# Altium PCB PCB2.PcbDoc
Units mm, origin at the board's own origin, x right, y up, seen from the top; angles counter-clockwise.
Board outline 50 x 30 mm, 2 copper layers (Top Layer, Bottom Layer); 23 components, 21 nets, 102 pads, 22 vias.
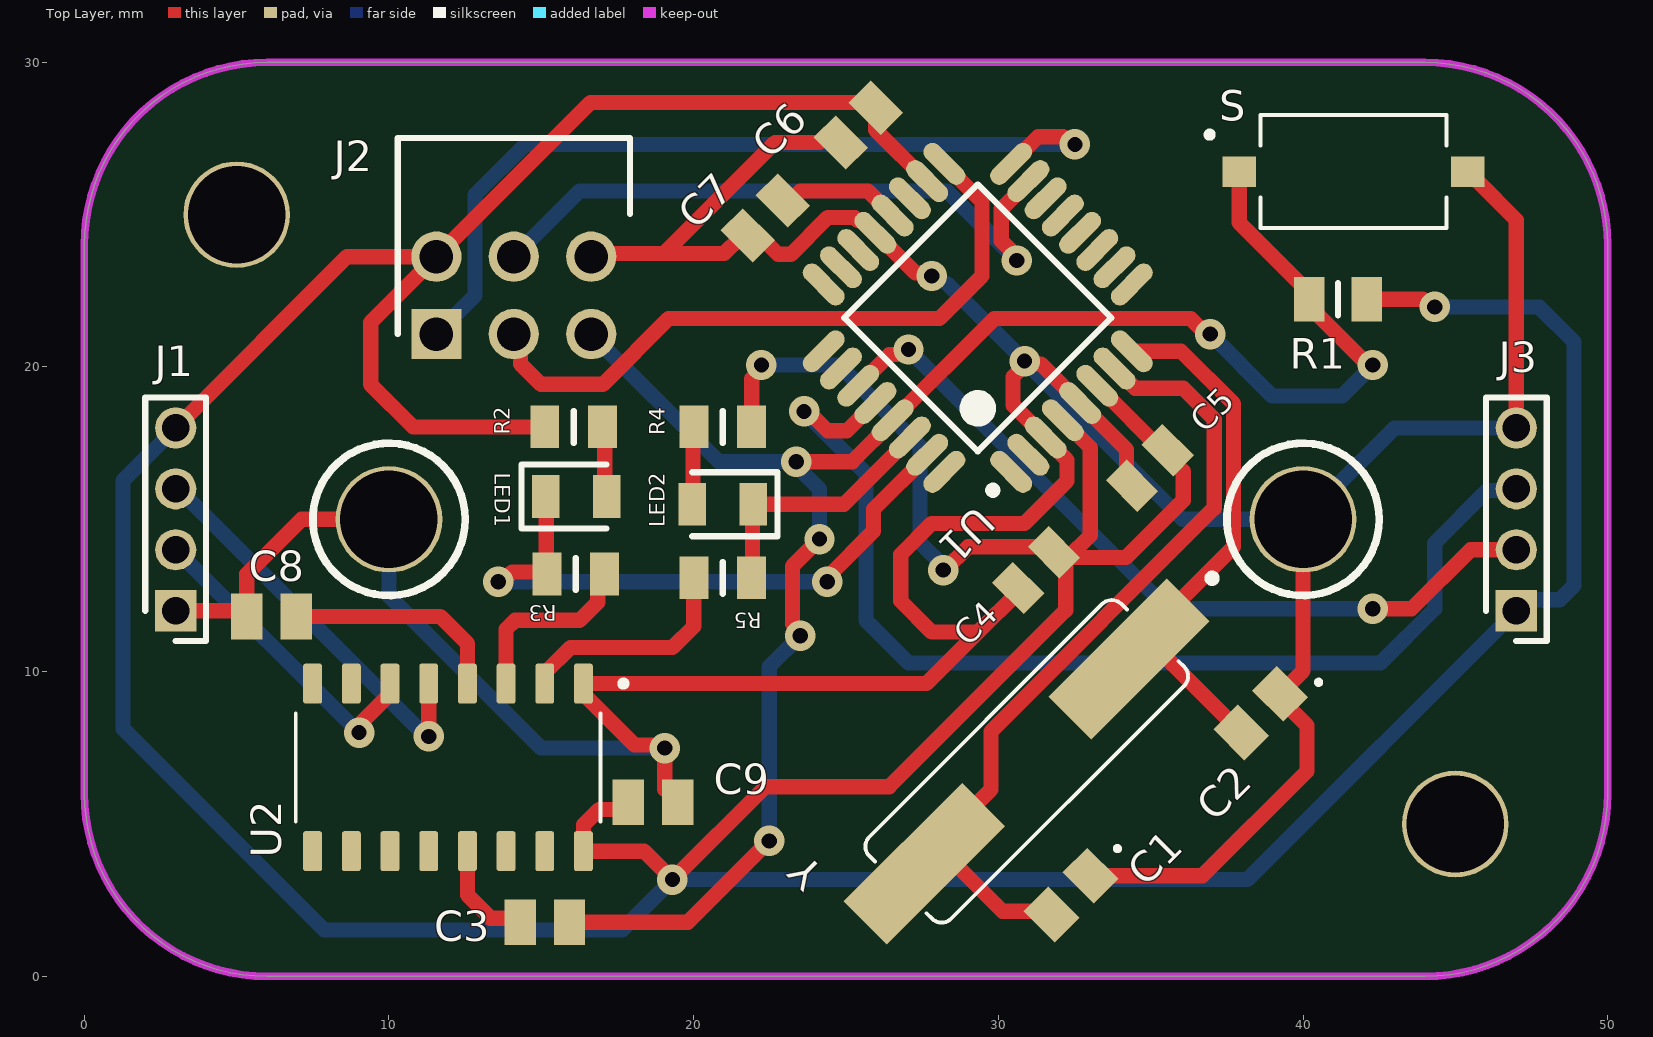
[diagram p0: Top Layer view]
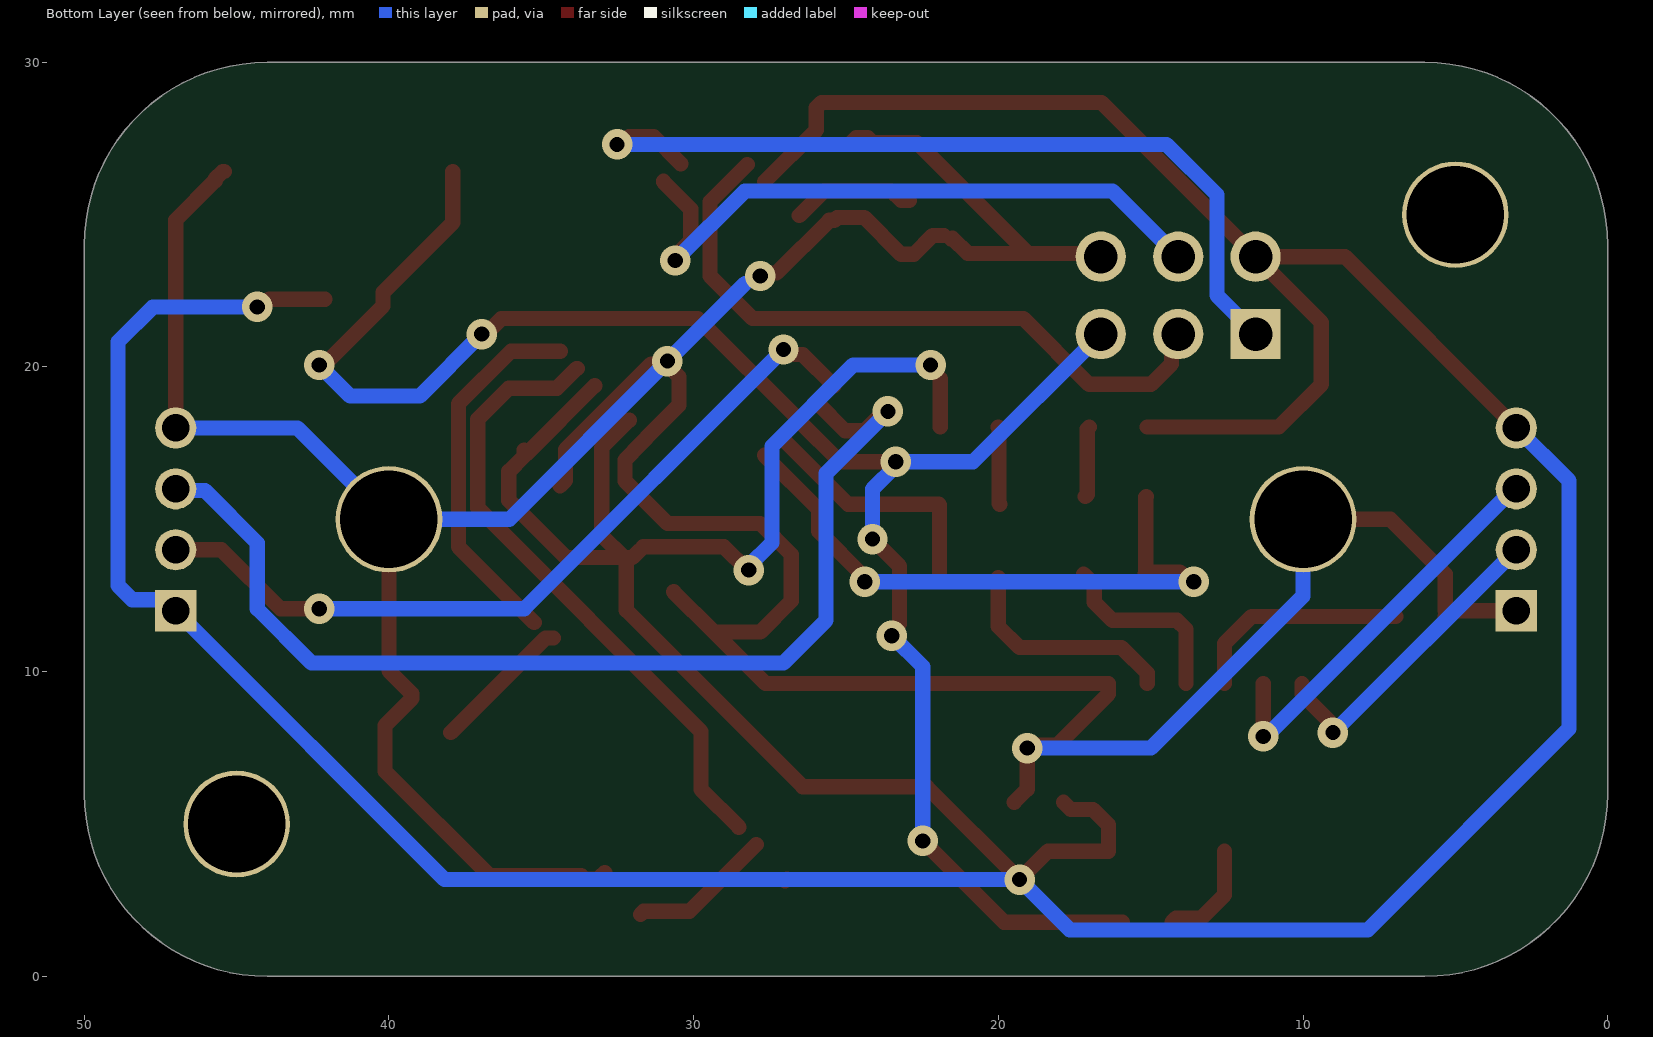
[diagram p1: Bottom Layer view, seen from below]
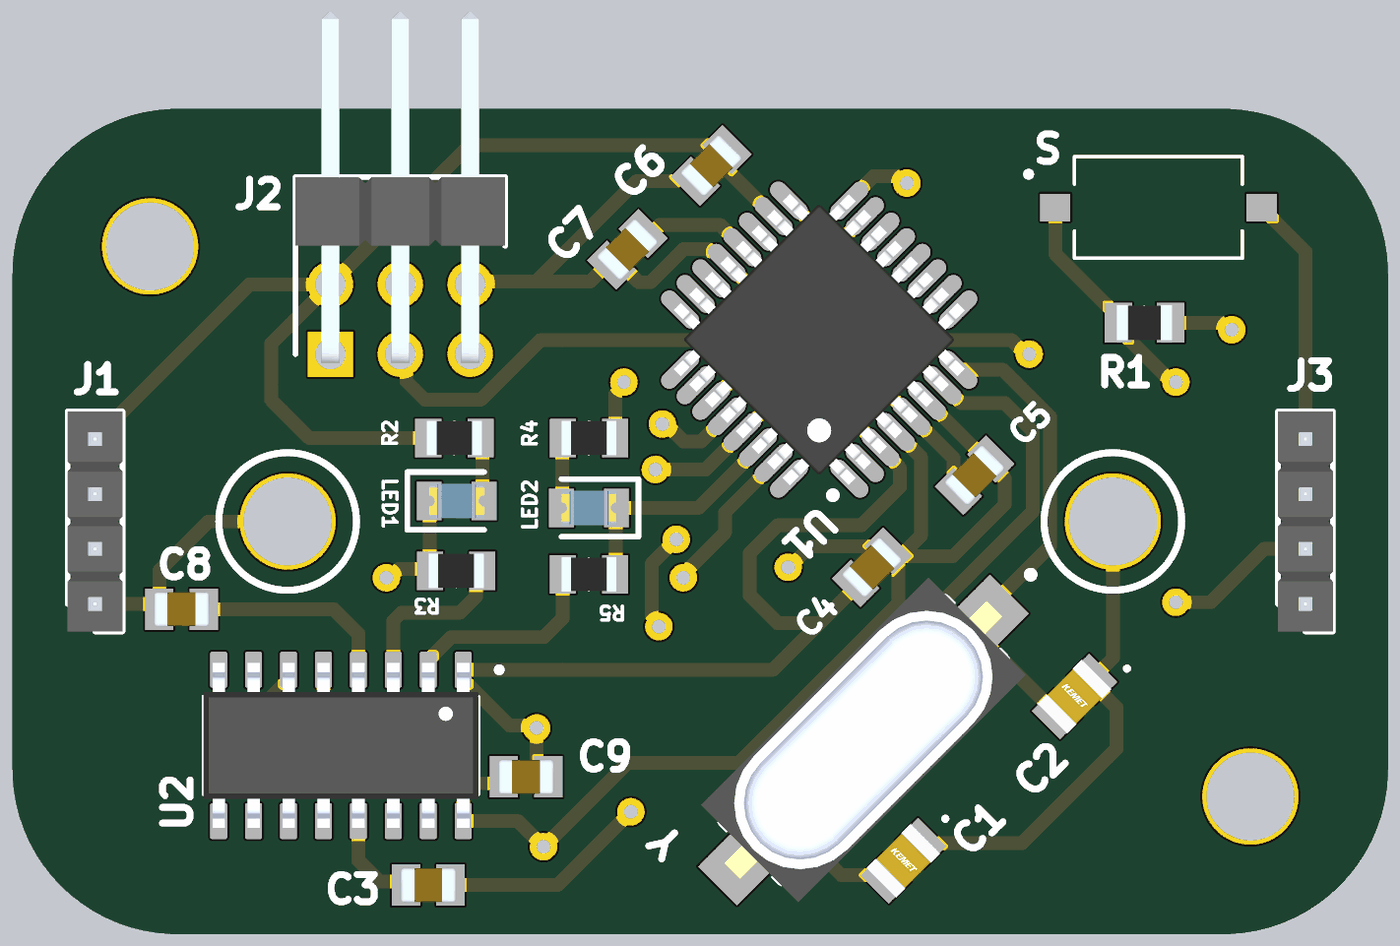
[diagram p2: 3D render of the assembled board from above, using the file's embedded part models]

## Layer stack, top to bottom
Top Solder: solder mask 0.0102, Solder Resist, Dk 3.5
Top Layer: signal copper 0.0356
Dielectric 1: dielectric 0.32, FR-4, Dk 4.8
Bottom Layer: signal copper 0.0356
Bottom Solder: solder mask 0.0102, Solder Resist, Dk 3.5

## Board outline
6,0 cw(c6,6) 0,6 0,24 cw(c6,24) 6,30 44,30 cw(c44,24) 50,24 50,6 cw(c44,6) 44,0

## Design rules (kind name [scope] priority, off if disabled: settings)
BoardOutlineClearance [All] p1: gap=0.2 ignorepadtopadclearanceinfootprint=FALSE
Clearance [All] p1: gap=0.127 ignorepadtopadclearanceinfootprint=FALSE except(0.25: Arc-Hole Track-Hole SMDPad-Hole THPad-Hole Via-Hole Fill-Hole Poly-Hole Region-Hole Text-Hole)
ComponentClearance [All] p1: gap=0.127 collisioncheckmode=3 verticalgap=0.127 showdistances=TRUE
DiffPairsRouting [All] p1: maxlimit=0.254 minlimit=0.127 mostfreqgap=0.127 toplayer_minwidth=0.127 toplayer_maxwidth=25.4 toplayer_prefwidth=0.127 bottomlayer_minwidth=0.127 bottomlayer_maxwidth=25.4 bottomlayer_prefwidth=0.127 maxuncoupledlength=12.7
Height [All] p1: minheight=0 maxheight=1816.048 prefheight=12.7
HoleSize [All] p1: absolutevalues=TRUE maxlimit=6.3 minlimit=0.3 maxpercent=80.000 minpercent=20.000
HoleToHoleClearance [All] p1: gap=0.25 allowstackedmicrovias=FALSE
MinimumAnnularRing [All] p1: minimumring=0.076
MinimumSolderMaskSliver [All] p1: minsoldermaskwidth=0
PlaneClearance [All] p1: clearance=0.127
PlaneConnect PlaneConnectPowerPads [InPadClass('PowerPads')] p1: planeconnectstyle=Direct reliefexpansion=0.508 reliefentries=4 reliefconductorwidth=0.254 reliefairgap=0.254
PlaneConnect [All] p2: pad.planeconnectstyle=Relief pad.reliefexpansion=0.3 pad.reliefentries=4 pad.reliefconductorwidth=0.127 pad.reliefairgap=0.127 via.planeconnectstyle=Direct via.reliefexpansion=0.3 via.reliefentries=4 via.reliefconductorwidth=0.127 via.reliefairgap=0.127
PolygonConnect PolygonConnectPowerPads [All vs (InPadClass('PowerPads'))] p1: connectstyle=Direct reliefconductorwidth=0.254 reliefentries=4 polygonreliefangle="90 Angle" airgapwidth=0.254
PolygonConnect [All] p2: thpad.connectstyle=Relief thpad.reliefconductorwidth=0.127 thpad.reliefentries=4 thpad.polygonreliefangle="90 Angle" thpad.airgapwidth=0.127 smdpad.connectstyle=Relief smdpad.reliefconductorwidth=0.127 smdpad.reliefentries=4 smdpad.polygonreliefangle="90 Angle" smdpad.airgapwidth=0.127 via.connectstyle=Direct via.reliefconductorwidth=0.127 via.reliefentries=4 via.polygonreliefangle="90 Angle" via.airgapwidth=0.127
RoutingVias [All] p1: holewidth=0.3 width=0.6 viastyle="Through Hole" minholewidth=0.3 minwidth=0.6 maxholewidth=0.6 maxwidth=6.6
SilkToSilkClearance [All] p1: silktosilkclearance=0
SilkToSolderMaskClearance [IsPad] p1: minsilkscreentomaskgap=0.127 clearancetoexposedcopper=TRUE
SolderMaskExpansion [All] p1: expansion=0.075 istentingtop=FALSE
Width [All] p1: maxlimit=25.4 minlimit=0.127 preferedwidth=0.127 minimp=50.000000 maximp=50.000000 favimp=50.000000
20 further rules are at their usual default settings.

## Classes and differential pairs
component class "Serial Port": C8 C9 LED1 LED2 R2 R3 R4 R5 U2
component class Schematic: J1 J2 J3
component class MCU: C1 C2 C3 C4 C5 C6 C7 R1 S U1 Y

## Components (designator, comment, footprint, x,y, rotation, side; value= is the part's Value field where it differs from the comment)
C1 "22pF" C0805 32.385,2.667 r225 top
C2 "22pF" C0805 38.608,8.636 r225 top
C3 "100nF" CAPC2013X137N 15.113,1.778 r180 top
C4 "10uF" CAPC2012X145N 31.242,13.335 r45 top
C5 "10uF" CAPC2012X145N 34.973,16.685 r45 top
C6 "100nF" CAPC2013X137N 25.4,27.94 r45 top
C7 "100nF" CAPC2013X137N 22.352,24.892 r45 top
C8 "100nF" CAPC2013X137N 6.144,11.811 r0 top
C9 "100nF" CAPC2013X137N 18.669,5.715 r180 top
J1 "2PH1-04-UA" HDRV4W50P0X200_1X4_800X200X590P 3,12 r90 top
J2 "PH2RA-06-UA" HDRRA6W64P254_2X3_762X250X500P 11.557,21.082 r0 top
J3 "2PH1-04-UA" HDRV4W50P0X200_1X4_800X200X590P 47,12 r90 top
LED1 "597-3305-607F" LEDC2012X70N 16.145,15.748 r0 top
LED2 "597-3305-607F" LEDC2012X70N 20.955,15.494 r180 top
R1 "10K" RESC2013X65N 41.148,22.225 r0 top
R2 "1K" RESC2012X60N 16.063,18.034 r0 top
R3 "1K" RESC2012X60N 16.129,13.208 r0 top
R4 "1K" RESC2012X60N 20.955,18.034 r180 top
R5 "1K" RESC2012X60N 20.955,13.081 r180 top
S "TS09-63-25-R-260-SMT-TR" SW_TS09-63-25-R-260-SMT-TR 41.656,26.416 r0 top
U1 "ATMEGA328P-AU" ATML-32A_M 29.324,21.612 r135 top
U2 "CH340C" SOIC127P600X180-16N 11.938,6.858 r270 top
Y "16MHz" XTAL_FOXSDLF/160-20 30.931,7.055 r225 top

## Footprints (in the part's own frame and the unit in brackets; to place one, negate y for a bottom-side part, rotate by r counter-clockwise, add the part's x,y. Pads: shape width x height; smd on the part's side, far side on the other; paste and mask are expansions set on the pad)
ATML-32A_M [mm] "TQFP, 32-Leads, Body 7x7mm, Pitch 0.8mm, IPC Low Density"
  oval 1.7x0.6 smd: 1(-4.35,2.8) 2(-4.35,2) 3(-4.35,1.2) 4(-4.35,0.4) 5(-4.35,-0.4) 6(-4.35,-1.2) 7(-4.35,-2) 8(-4.35,-2.8) 17(4.35,-2.8) 18(4.35,-2) 19(4.35,-1.2) 20(4.35,-0.4) 21(4.35,0.4) 22(4.35,1.2) 23(4.35,2) 24(4.35,2.8)
  oval 0.6x1.7 smd: 9(-2.8,-4.35) 10(-2,-4.35) 11(-1.2,-4.35) 12(-0.4,-4.35) 13(0.4,-4.35) 14(1.2,-4.35) 15(2,-4.35) 16(2.8,-4.35) 25(2.8,4.35) 26(2,4.35) 27(1.2,4.35) 28(0.4,4.35) 29(-0.4,4.35) 30(-1.2,4.35) 31(-2,4.35) 32(-2.8,4.35)
  silkscreen extent -4.47,-3.1 3.1,3.77, body extent -4.5,-4.5 4.5,4.5, height 1.2
C0805 [mm]
  rect 1.15x1.45 smd: 1(-0.9,0) 2(0.9,0)
  silkscreen extent -2.21,-0.05 -2.11,0.05, body extent -1.15,-0.78 1.15,0.77, height 0.98
CAPC2012X145N [mm]
  rect 0.97x1.47 smd: 1(-0.83,0) 2(0.83,0)
  body extent -1,-0.62 1,0.62, height 1.45
CAPC2013X137N [mm]
  rect 1.03x1.5 smd: 1(-0.81,0) 2(0.81,0)
  body extent -1.01,-0.64 1.01,0.64, height 1.37
HDRRA6W64P254_2X3_762X250X500P [mm]
  rect 1.65x1.65 hole 1.1: 1(0,0)
  round 1.65 hole 1.1: 2(0,2.54) 3(2.54,0) 4(2.54,2.54) 5(5.08,0) 6(5.08,2.54)
  silkscreen extent -1.27,0 6.35,6.44, body extent -1.27,-0.32 6.35,12.44, height 5
HDRV4W50P0X200_1X4_800X200X590P [mm]
  rect 1.35x1.35 hole 0.9: 1(0,0)
  round 1.35 hole 0.9: 2(2,0) 3(4,0) 4(6,0)
  silkscreen extent -1,-1 7,1, body extent -1,-1 7,1, height 5.9
LEDC2012X70N [mm]
  rect 0.9x1.4 smd: 1(-1,0) 2(1,0)
  silkscreen extent -1.8,-1.05 1,1.05, body extent -1,-0.63 1,0.63, height 0.71
RESC2012X60N [mm]
  rect 0.95x1.4 smd: 1(-0.95,0) 2(0.95,0)
  silkscreen extent 0,-0.53 0,0.53, body extent -1,-0.63 1,0.63, height 0.6
RESC2013X65N [mm]
  rect 1x1.45 smd: 1(-0.95,0) 2(0.95,0)
  silkscreen extent 0,-0.54 0,0.54, body extent -1,-0.64 1,0.64, height 0.65
SOIC127P600X180-16N [mm]
  rrect25% 1.31x0.62 smd: 1(-2.75,4.445) 2(-2.75,3.175) 3(-2.75,1.905) 4(-2.75,0.635) 5(-2.75,-0.635) 6(-2.75,-1.905) 7(-2.75,-3.175) 8(-2.75,-4.445) 9(2.75,-4.445) 10(2.75,-3.175) 11(2.75,-1.905) 12(2.75,-0.635) 13(2.75,0.635) 14(2.75,1.905) 15(2.75,3.175) 16(2.75,4.445)
  silkscreen extent -2.85,-5 1.78,5.85, body extent -3,-5 3,5, height 1.8
SW_TS09-63-25-R-260-SMT-TR [mm]
  rect 1.1x1 smd: 1(-3.75,0) 2(3.75,0)
  silkscreen extent -4.82,-1.85 3.05,1.85
XTAL_FOXSDLF/160-20 [mm]
  rect 5.5x2 smd: 1(-4.75,0) 2(4.75,0)
  silkscreen extent -8.6,-1.9 5.85,1.9, body extent -6.75,-2.5 6.75,2.5, height 4.5

## Part data
C1 C2: library part C0805X220J1GACTU, "Capacitor", Manufacturer_Name=KEMET, Mouser Part Number=80-C0805X220J1GACTU, Datasheet Link=https://content.kemet.com/datasheets/KEM_C1062_C0G_FT-CAP_SMD.pdf, Height=1.1mm, Manufacturer_Part_Number=C0805X220J1GACTU, Mouser Price/Stock=https://www.mouser.co.uk/ProductDetail/KEMET/C0805X220J1GACTU?qs=ds50AKTGxA9gC%252BgDVpAXPw%3D%3D
C3 C6 C7 C8 C9: library part 0805B104K500NT, "Capacitor", Manufacturer_Name=Novacap, Mouser Part Number=767-0805B104K500NT, Datasheet Link=https://componentsearchengine.com/Datasheets/1/0805B104K500NT.pdf, Height=1.37mm, Manufacturer_Part_Number=0805B104K500NT, Mouser Price/Stock=https://www.mouser.com/Search/Refine.aspx?Keyword=767-0805B104K500NT
C4 C5: library part GCM21BC71E106KE36K, "Capacitor", Manufacturer_Name="Murata Electronics", Mouser Part Number=81-GCM21B71E106KE36K, Datasheet Link=https://search.murata.co.jp/Ceramy/image/img/A01X/G101/ENG/GRM21BC71E106KE11-01.pdf, Height=1.45mm, Manufacturer_Part_Number=GCM21BC71E106KE36K, Mouser Price/Stock=https://www.mouser.co.uk/ProductDetail/Murata-Electronics/GCM21BC71E106KE36K?qs=By6Nw2ByBD3dg3yZS4KZOA%3D%3D
J1 J3: "Connector", Manufacturer_Name="Adam Tech", Mouser Part Number=737-2PH1-04-UA, Datasheet Link=https://datasheet.datasheetarchive.com/originals/distributors/Datasheets_SAMA/1340c19c3c34daa1512378d1cc9f6be0.pdf, Height=5.9mm, Manufacturer_Part_Number=2PH1-04-UA, Mouser Price/Stock=https://www.mouser.co.uk/ProductDetail/Adam-Tech/2PH1-04-UA?qs=HoCaDK9Nz5foLmmthkPmJw%3D%3D
J2: "Connector", Manufacturer_Name="Adam Tech", Arrow Part Number=PH2RA-06-UA, Arrow Price/Stock=https://www.arrow.com/en/products/ph2ra-06-ua/adam-tech, Datasheet Link=https://static6.arrow.com/aropdfconversion/38d430c3bbd26836f869f57df34a7f03090e7de1/782downloader.phppph2ra-xx-ua.pdf, Height=5mm, Manufacturer_Part_Number=PH2RA-06-UA
LED1 LED2: "LED", Manufacturer_Name=Dialight, Mouser Part Number=645-597-3305-607F, Arrow Part Number=597-3305-607F, Arrow Price/Stock=https://www.arrow.com/en/products/597-3305-607f/dialight, Datasheet Link=https://mouser.componentsearchengine.com/Datasheets/1/597-3305-607F.pdf, Height=0.7mm, Manufacturer_Part_Number=597-3305-607F, Mouser Price/Stock=https://www.mouser.com/Search/Refine.aspx?Keyword=645-597-3305-607F
R1: library part 0805W8F1002T5E, "Resistor", Manufacturer_Name=UniOhm, Height=0.65mm, Manufacturer_Part_Number=0805W8F1002T5E
R2 R3 R4 R5: library part RC0805FR-071KL, "Resistor", Manufacturer_Name=YAGEO, Mouser Part Number=603-RC0805FR-071KL, Arrow Part Number=RC0805FR-071KL, Arrow Price/Stock=https://www.arrow.com/en/products/rc0805fr-071kl/yageo?region=europe, Datasheet Link=https://www.yageo.com/upload/media/product/productsearch/datasheet/rchip/PYu-RC_Group_51_RoHS_L_11.pdf, Height=0.6mm, Manufacturer_Part_Number=RC0805FR-071KL, Mouser Price/Stock=https://www.mouser.co.uk/ProductDetail/YAGEO/RC0805FR-071KL?qs=1ogmaHw32WJjeGY0DHXakQ%3D%3D
S: Package=None, Availability=Unavailable, MP=TS09-63-25-R-260-SMT-TR, Price=None
U1: library part CMP-020-00003-3, "8-Bit Microcontroller with 32 KBytes In-System Programmable Flash, 23 I/Os, -40 to 85 degC, 32-Pin TQFP (32A), RoHS, Tray", Case/Package=TQFP, Clock Frequency=20MHz, Manufacturer=Atmel, Max Operating Temperature=85°C, Max Supply Voltage=5.5V, Min Operating Temperature=-40°C, Min Supply Voltage=1.8V, Package Description="32-Pin Thin Profile Plastic Quad Flat Package, Body 7 x 7 mm, Pitch 0.8 mm", Package Quantity=250, Package Reference=32A, ADC Channels=8, Datasheet URL=http://www.atmel.com/images/Atmel-8271-8-bit-AVR-Microcontroller-ATmega48A-48PA-88A-88PA-168A-168PA-328-328P_datasheet_Complete.pdf, Datasheet Version="Rev. 8271J, 11/2015", Density=32KB, Ethernet Channels=0, Frequency=20MHz, I/Os=23, Interface=USART, Manufacturer URL=http://www.atmel.com/, Max Clock Frequency=20MHz, Mounting Technology=SM, Packaging=Tray, Pins=32, PWM Channels=6, RAM Size=2KB, RoHS Compliant=True, USB Channels=0
U2: "USB to serial chip CH340", Package=None, Availability="Not in stock", Check_prices=https://www.snapeda.com/parts/CH340C/WCH/view-part/?ref=eda, MF=WCH, MP=CH340C, Price=None, SnapEDA_Link=https://www.snapeda.com/parts/CH340C/WCH/view-part/?ref=snap
Y: library part FOXSDLF/160-20, "Microprocessor, Crystal; 16 Mhz; + 30 Ppm @ Degc; 7 Pf (Max.); 20 Pf; -20 Deg", Package="HC49SD Fox Electronics", Availability="In Stock", Check_prices=https://www.snapeda.com/parts/FOXSDLF/160-20/Fox+Electronics/view-part/?ref=eda, MF="Fox Electronics", MP=FOXSDLF/160-20, Price=None, SnapEDA_Link=https://www.snapeda.com/parts/FOXSDLF/160-20/Fox+Electronics/view-part/?ref=snap

## Free pads (board coordinates)
  round 3.5 hole 3.2: 2(10,15) 3(40,15) 4(5,25) 5(45,5)

## Via types
v1: diameter 1, hole 0.5, Top Layer to Bottom Layer, 22 vias

## Nets (pads, with @x,y where several pads share a name; then routed paths per layer and width w, separated by ;. In a path a pad name is that pad's centre, name@x,y a point inside that pad or via, vN(x,y) a via of type N, cw(c..) or ccw(c..) an arc to the next point about the centre after c; other vN are vias at no path point)
GND: C1.1 C2.1 C4.1 C5.1 C6.1 C7.1 C8.1 C9.1 J1.1 J2.6 J3.4 pad.2 pad.3 S.2 U1.3 U1.5 U1.21 U2.1 | length 135.3
  Top Layer w0.5: J1.1 5.145,12 5.207,11.938 C8.1 ; C8.1@5.334,12 5.334,13.208 7.126,15 pad.2 ; J2.6 16.738,23.723 19.024,23.723 ; C9.1 19.05,6.144 v1(19.05,7.493) 18.954,7.589 18.057,7.589 16.383,9.263 U2.1 27.642,9.608 29.337,11.303 ; C7.1@21.531,24.192 21.5,24.223 21,23.723 19.024,23.723 ; C7.1 22.154,24.319 22.776,23.698 23.19,23.698 24.397,24.905 25.291,24.905 25.384,24.813 25.548,24.813 27.279,23.083 27.717,23.083 v1(27.813,22.987) ; C6.1 24.661,27.533 24.286,27.533 24.12,27.367 22.668,27.367 19.024,23.723 ; C4.1@30.655,12.621 29.337,11.303 ; v1@30.861,20.058 30.484,19.68 30.484,18.746 31.564,17.666 31.564,17.648 31.991,17.222 31.991,17.212 32.258,16.945 32.258,16.256 30.861,14.859 27.813,14.859 26.797,13.843 26.797,12.319 27.813,11.303 29.337,11.303 ; v1@30.957,20.097 31.395,20.097 U1.5@32.678,18.814 ; U1.5 34.209,17.293 34.209,16.275 C5.1 ; C1.1@32.915,3.409 C1.1 33.127,3.197 33.587,3.197 33.693,3.303 36.704,3.303 40.132,6.731 40.132,8.234 39.244,9.122 C2.1 40,10.028 pad.3 ; S.2 45.456,26.416 45.706,26.166 45.706,26.116 47,24.822 J3.4
  Bottom Layer w0.5: pad.2 10,12.479 14.986,7.493 v1(19.05,7.493) ; 28.317,22.737 v1(30.861,20.193) 36.054,15 pad.3 43,18 J3.4
MISO: J2.1 U1.16 | length 28
  Top Layer w0.5: U1.16 31.311,27.559 32.123,27.559 32.377,27.305 v1(32.512,27.305)
  Bottom Layer w0.5: J2.1 12.827,22.352 12.827,25.654 14.478,27.305 v1(32.512,27.305)
MOSI: J2.4 U1.15 | length 21.5
  Top Layer w0.5: v1(30.607,23.495) 30.607,23.63 30.099,24.138 30.099,25.188 30.986,26.075 U1.15
  Bottom Layer w0.5: J2.4 16.256,25.781 28.321,25.781 v1(30.607,23.495)
NetC1_2: C1.2 U1.7 Y.2 | length 25.7
  Top Layer w0.5: Y.2@26.937,3.188 Y.2@27.001,3.125 ; Y.2@27.947,4.325 30.135,2.137 31.643,2.137 C1.2 ; Y.2@28.518,4.896 29.756,6.134 29.756,8.039 37.084,15.367 37.084,18.288 36.068,19.304 34.488,19.304 33.841,19.95 U1.7
NetC2_2: C2.2 U1.8 Y.1 | length 16.9
  Top Layer w0.5: U1.8 35.999,20.516 37.719,18.796 37.719,14.097 Y.1@35.236,11.614 ; Y.1@34.601,11.106 34.865,11.106 C2.2
NetC3_2: C3.2 U2.13 | length 3.5
  Top Layer w0.5: U2.13 12.573,2.667 13.331,1.909 14.172,1.909 C3.2
NetC7_2: C7.2 U1.20 | length 4.1
  Top Layer w0.5: C7.2 23.185,25.465 23.501,25.781 25.721,25.781 U1.20
NetC8_2: C8.2 U2.4 | length 7.3
  Top Layer w0.5: C8.2 11.684,11.811 12.573,10.922 U2.4
NetJ1_2: J1.2 U2.6 | length 10.5
  Top Layer w0.5: v1(9.017,8.001) 9.113,8.097 9.113,8.343 10.033,9.263 U2.6
  Bottom Layer w0.5: J1.2 3.009,14 9.008,8.001 v1(9.017,8.001)
NetJ1_3: J1.3 U2.5 | length 13.4
  Top Layer w0.5: v1(11.303,7.874) U2.5
  Bottom Layer w0.5: J1.3 3.089,16 11.215,7.874 v1(11.303,7.874)
NetLED1_2: LED1.2 R2.2 | length 2.3
  Top Layer w0.5: R2.2 17.079,17.968 17.079,15.814 LED1.2
NetLED2_2: LED2.2 R4.2 | length 2.6
  Top Layer w0.5: LED2.2 19.98,15.519 19.98,18.009 R4.2
NetR3_2: R3.2 U2.3 | length 6.2
  Top Layer w0.5: U2.3 13.843,11.391 14.136,11.684 16.256,11.684 16.854,12.282 16.854,12.856 R3.2@17.206,13.208
NetR5_2: R5.2 U2.2 | length 7.5
  Top Layer w0.5: U2.2 15.113,9.953 15.955,10.795 19.309,10.795 20.005,11.491 R5.2
Reset: C3.1 J2.5 R1.1 S.1 U1.29 | length 60.4
  Top Layer w0.5: C3.1 19.812,1.778 v1(22.479,4.445) ; v1(23.368,16.891) 25.204,16.891 U1.29@26.544,18.231 ; v1(23.495,11.176) 23.495,11.311 23.241,11.565 23.241,13.462 v1(24.13,14.351) ; U1.29 29.868,21.59 36.314,21.59 36.822,21.082 v1(36.957,21.082) ; S.1 37.906,24.742 40.198,22.45 R1.1 40.198,22 42.036,20.162 42.195,20.162 v1(42.291,20.066)
  Bottom Layer w0.5: J2.5 20.828,16.891 v1(23.368,16.891) 23.368,16.756 24.13,15.994 v1(24.13,14.351) ; v1(22.479,4.445) 22.479,10.16 v1(23.495,11.176) ; v1(36.957,21.082) 38.989,19.05 41.275,19.05 v1(42.291,20.066)
RX: LED2.1 R5.1 U1.30 | length 8.5
  Top Layer w0.5: R5.1 21.93,13.106 21.93,15.469 LED2.1 24.938,15.494 U1.30@27.11,17.666
SCK: J2.3 U1.17 | length 22.1
  Top Layer w0.5: J2.3 14.317,20.862 14.317,20.1 14.986,19.431 17.018,19.431 19.177,21.59 28.067,21.59 29.464,22.987 29.464,25.423 U1.17@28.241,26.646
SCL: J3.3 U1.28 | length 36.2
  Top Layer w0.5: v1(23.622,18.542) 23.757,18.542 24.392,17.907 25.026,17.907 25.938,18.819 U1.28
  Bottom Layer w0.5: v1(23.622,18.542) 25.654,16.51 25.654,11.684 27.051,10.287 42.545,10.287 44.323,12.065 44.323,14.224 46.042,15.943 46.943,15.943 J3.3
SDA: J3.2 U1.27 | length 26.4
  Top Layer w0.5: U1.27 26.422,20.407 26.884,20.407 v1(27.051,20.574) ; v1(42.291,12.065) 43.561,12.065 45.496,14 J3.2
  Bottom Layer w0.5: v1(27.051,20.574) 35.56,12.065 v1(42.291,12.065)
TX: LED1.1 R3.1 U1.31 | length 20.6
  Top Layer w0.5: v1(13.589,12.954) 13.724,12.954 14.042,13.271 14.954,13.271 15.017,13.208 R3.1 ; LED1.1 15.162,15.731 R3.1@15.162,13.225 ; v1(24.384,12.954) 24.384,13.089 25.906,14.612 25.906,15.331 U1.31@27.675,17.1
  Bottom Layer w0.5: v1(13.589,12.954) v1(24.384,12.954)
Vcc: C4.2 C5.2 C6.2 C9.2 J1.4 J2.2 J3.1 R1.2 R2.1 R4.1 U1.4 U1.6 U1.18 U2.16 | length 178.3
  Top Layer w0.5: J1.4 8.622,23.622 J2.2 ; R2.1 10.795,18.034 9.398,19.431 9.398,21.463 J2.2 ; C9.2 17.624,5.48 16.891,5.48 16.383,4.972 U2.16 18.371,4.108 v1(19.304,3.175) 22.352,6.223 26.416,6.223 32.21,12.017 32.21,13.668 C4.2@32.287,13.745 ; R4.1 21.905,19.611 ; U1.18@27.675,26.08 25.973,27.783 C6.2 25.807,28.679 16.614,28.679 J2.2 ; v1(28.194,13.335) 28.238,13.335 29.002,14.099 31.652,14.099 C4.2 32.006,13.745 C4.2@32.287,13.745 ; U1.4 33.02,17.351 33.02,14.478 C4.2@32.287,13.745 ; U1.6 C5.2@35.461,17.173 ; C5.2 35.56,17.084 36.068,16.576 36.068,15.621 34.192,13.745 C4.2@32.287,13.745 ; R1.2 v1@43.934,22.225
  Bottom Layer w0.5: J1.4 1.27,16.27 1.27,8.128 7.874,1.524 17.653,1.524 v1(19.304,3.175) 38.175,3.175 J3.1 47.357,12.357 48.425,12.357 48.895,12.827 48.895,20.828 47.752,21.971 v1(44.323,21.971) ; v1(22.225,20.066) 24.765,20.066 27.432,17.399 27.432,14.232 28.194,13.47 v1(28.194,13.335)
pads on no net: U1.1 U1.2 U1.9 U1.10 U1.11 U1.12 U1.13 U1.14 U1.19 U1.22 U1.23 U1.24 U1.25 U1.26 U1.32 U2.7 U2.8 U2.9 U2.10 U2.11 U2.12 U2.14 U2.15

## Keep-outs
Top Layer:
  the board outline again, w0.254

## Silkscreen, mask and mechanical layers (free items; w line width, h text height)
Top Overlay:
  circle w0.254: c40,15 r2.5
  circle w0.254: c10,15 r2.5